# Altium PCB Minigeki v0.3 (Altium Designer).PcbDoc
Units mm, origin at the board's own origin, x right, y up, seen from the top; angles counter-clockwise.
Board outline 150 x 100 mm, 2 copper layers (Top Layer, Bottom Layer); 12 components, 21 nets, 143 pads, 19 vias.
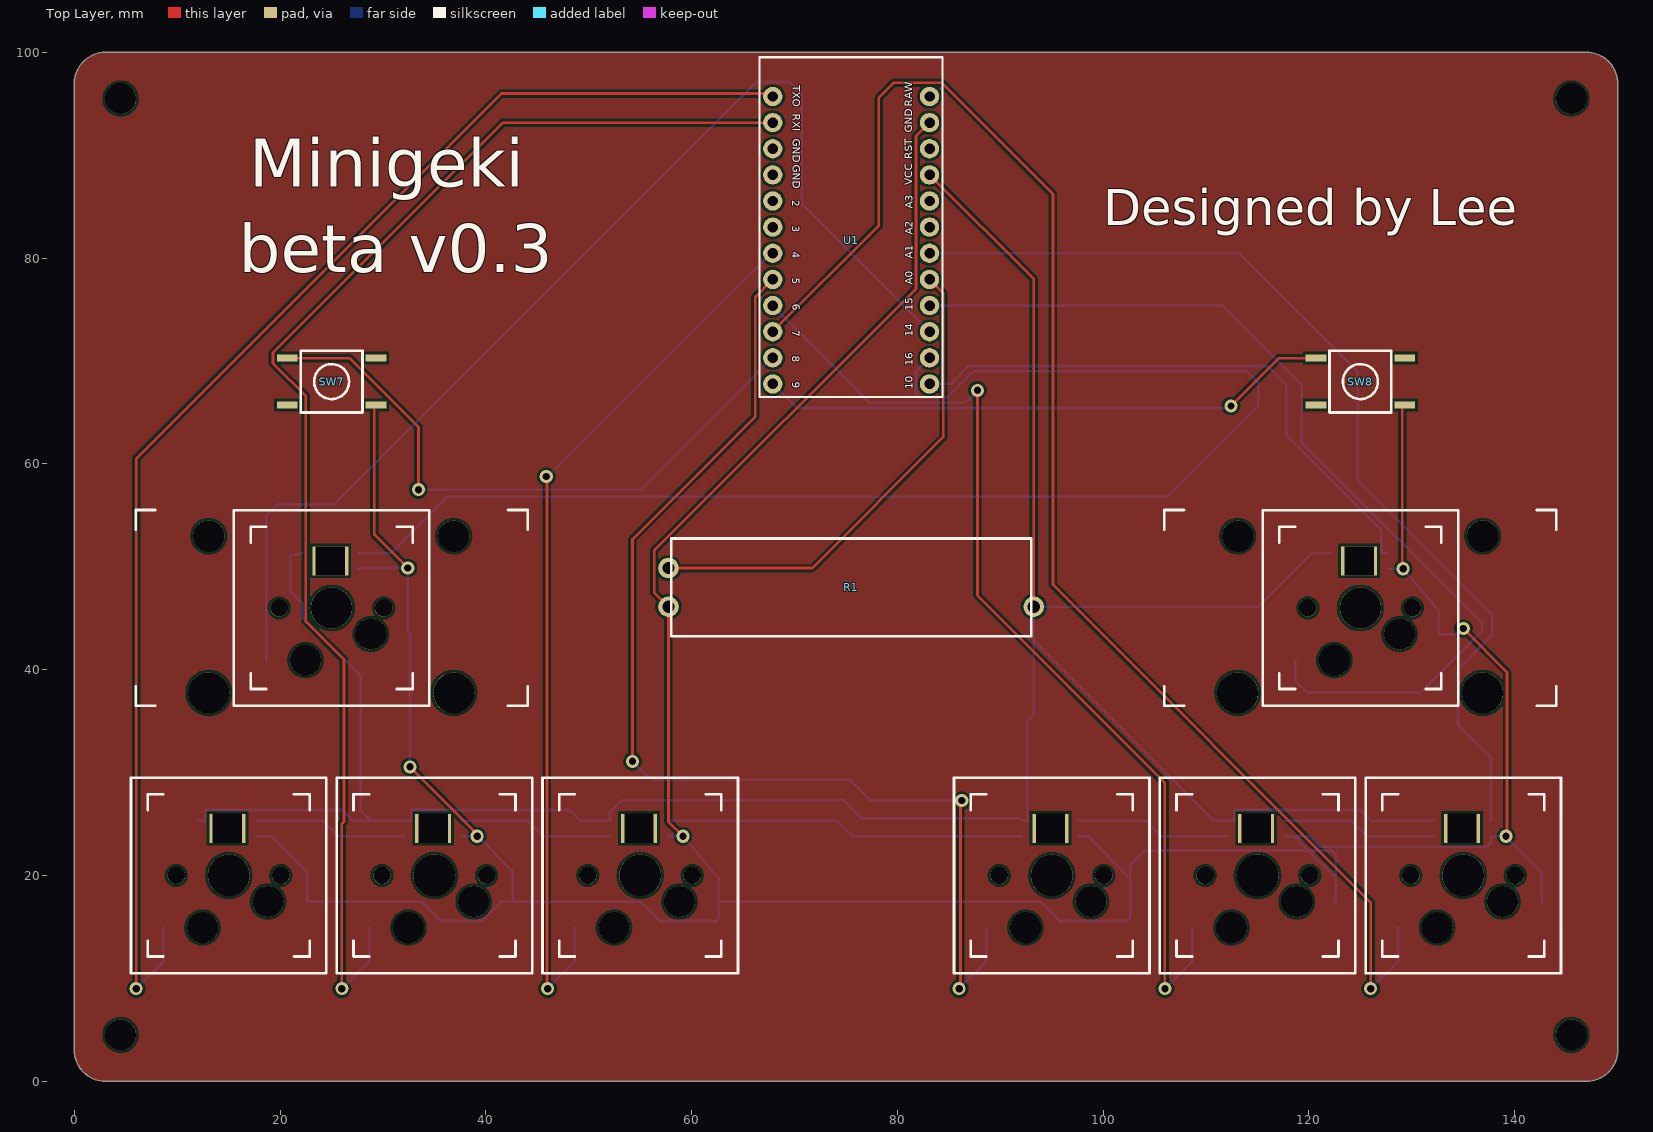
[diagram p0: Top Layer view]
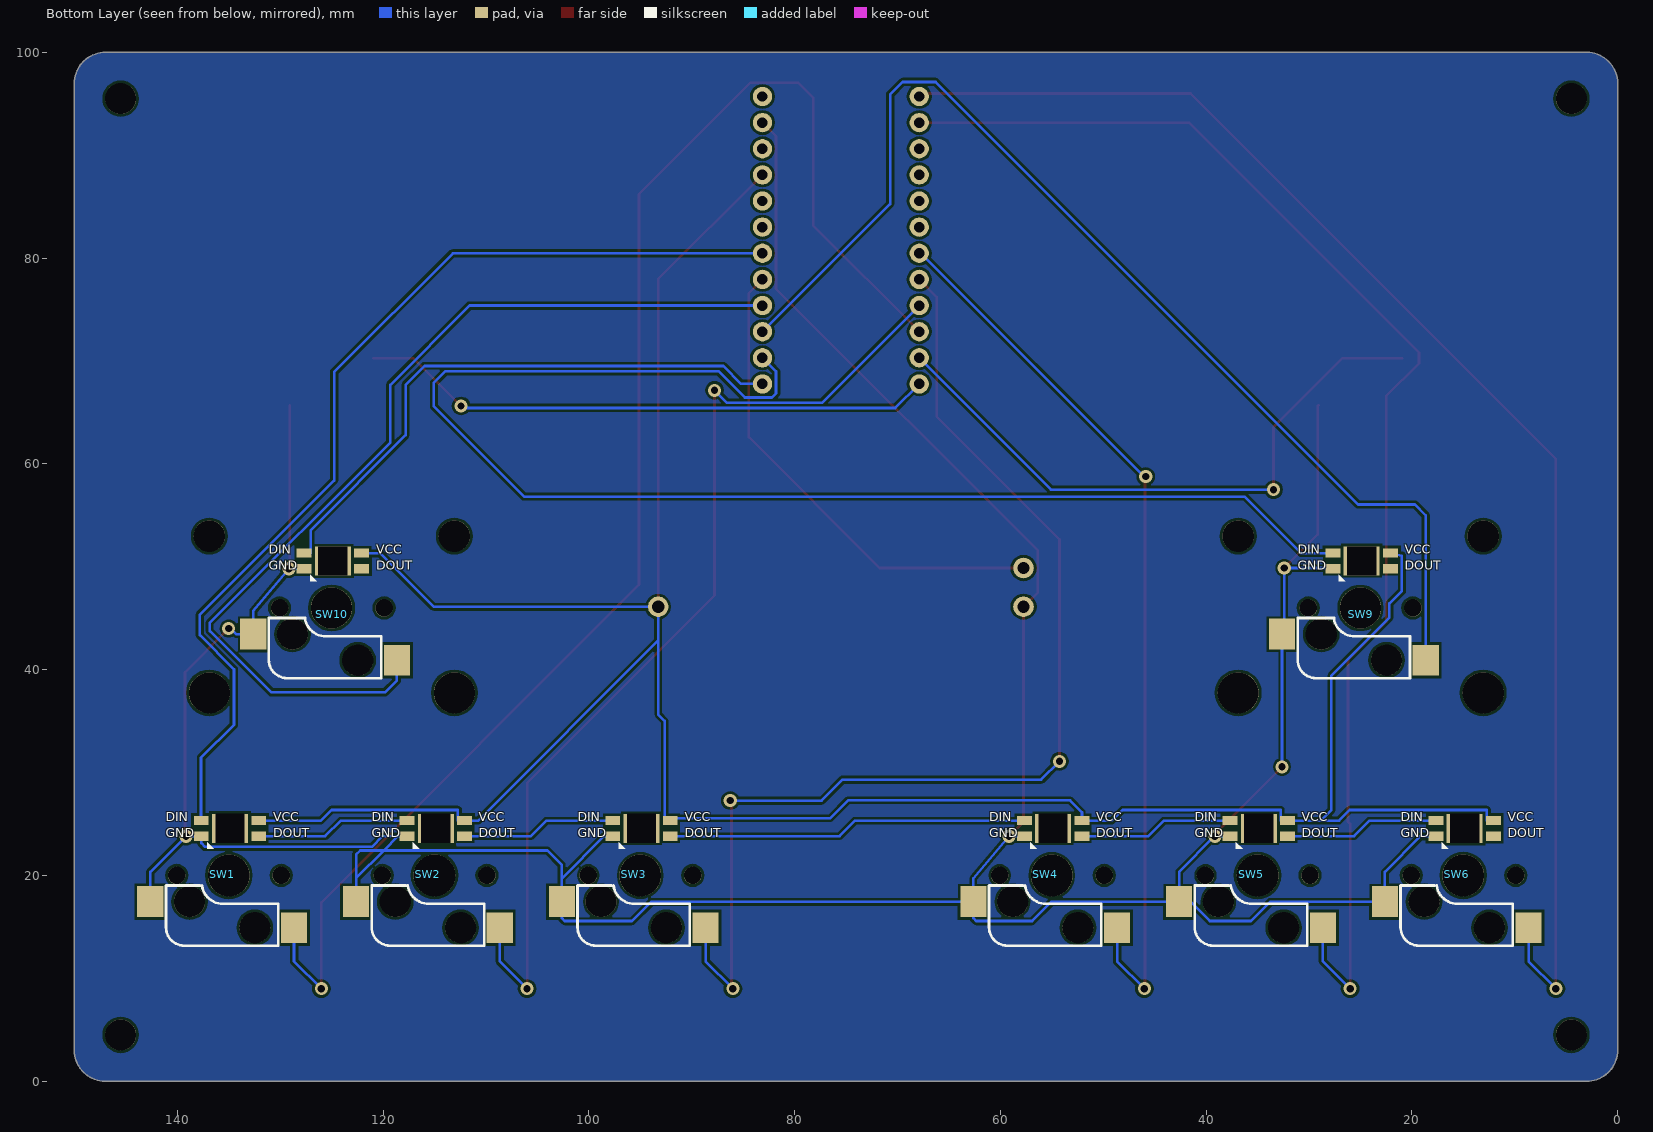
[diagram p1: Bottom Layer view, seen from below]

## Layer stack, top to bottom
Top Solder: solder mask 0.0102, Solder Resist, Dk 3.5
Top Layer: signal copper 0.0356
Dielectric 1: dielectric 0.32, FR-4, Dk 4.8
Bottom Layer: signal copper 0.0356
Bottom Solder: solder mask 0.0102, Solder Resist, Dk 3.5

## Board outline
0,3 ccw(c3,3) 3,0 147,0 ccw(c147,3) 150,3 150,97 ccw(c147,97) 147,100 3,100 ccw(c3,97) 0,97

## Design rules (kind name [scope] priority, off if disabled: settings)
Clearance [All] p1: gap=0.254 ignorepadtopadclearanceinfootprint=TRUE except(0: Arc-Hole Track-Hole SMDPad-Hole THPad-Hole Via-Hole Fill-Hole Poly-Hole Region-Hole Text-Hole)
PolygonConnect [All] p1: connectstyle=Relief reliefconductorwidth=0.254 reliefentries=4 polygonreliefangle="90 Angle" airgapwidth=0.254
RoutingVias [All] p1: holewidth=0.711 width=1.27 viastyle="Through Hole" minholewidth=0.711 minwidth=1.27 maxholewidth=0.711 maxwidth=1.27
SolderMaskExpansion [All] p1: expansion=0.102 istentingtop=FALSE
Width [All] p1: maxlimit=0.254 minlimit=0.254 preferedwidth=0.254
30 further rules are at their usual default settings.

## Components (designator, comment, footprint, x,y, rotation, side; value= is the part's Value field where it differs from the comment)
R1 "35mm滑动变阻器" 35MM滑动变阻器 75.5,48 r0 top
SW1 "MX_SW" MX_SW-1_HOTSWAP_RGB 135,20 r0 top
SW2 "MX_SW" MX_SW-1_HOTSWAP_RGB 115,20 r0 top
SW3 "MX_SW" MX_SW-1_HOTSWAP_RGB 95,20 r0 top
SW4 "MX_SW" MX_SW-1_HOTSWAP_RGB 55,20 r0 top
SW5 "MX_SW" MX_SW-1_HOTSWAP_RGB 35,20 r0 top
SW6 "MX_SW" MX_SW-1_HOTSWAP_RGB 15,20 r0 top
SW7 "SW_6X6" SW_6X6 25,68 r0 top
SW8 "SW_6X6" SW_6X6 125,68 r0 top
SW9 "MX_SW" MX_SW_2U_HOTSWAP_RGB 25,46 r0 top
SW10 "MX_SW" MX_SW_2U_HOTSWAP_RGB 125,46 r0 top
U1 "" PROMICRO 75.5,83 r0 top

## Footprints (in the part's own frame and the unit in brackets; to place one, negate y for a bottom-side part, rotate by r counter-clockwise, add the part's x,y. Pads: shape width x height; smd on the part's side, far side on the other; paste and mask are expansions set on the pad)
35MM滑动变阻器 [mm]
  round 2 hole 1.2: 1(-17.754,-1.88) 2(-17.754,1.88) 3(17.754,-1.88)
  silkscreen extent -17.5,-4.75 17.5,4.75
MX_SW-1_HOTSWAP_RGB [mil] "without Fixation pins  1-Pole"
  rect 100x118 smd far side: 1(300,-100) 2(-250,-200)
  rect 57x35.43 smd far side: 3(105,210) 4(105,150) 5(-115,210) 6(-115,150)
  round 66.93 hole 66.93 unplated: ""(-200.79,0) ""(199.21,0)
  round 118.11 hole 118.11 slot 118.31 at 0 deg unplated: ""(-100,-200.01) ""(150,-100.01)
  rect 137.8x110.24 hole 110.24 square unplated: ""(-5,180)
  round 160 hole 160: ""(0,0)
  silkscreen extent -374,-374 374,374
MX_SW_2U_HOTSWAP_RGB [mil]
  rect 100x118 smd far side: 1(300,-100) 2(-250,-200)
  rect 57x35.43 smd far side: 3(105,210) 4(105,150) 5(-115,210) 6(-115,150)
  round 157 hole 157 unplated: ""(-470,-325) ""(467.6,-325)
  round 120 hole 120 unplated: ""(-470,275) ""(467.6,275)
  round 66.93 hole 66.93 unplated: ""(-200.79,0) ""(199.21,0)
  round 118.11 hole 118.11 slot 118.31 at 0 deg unplated: ""(-100,-200.01) ""(150,-100.01)
  rect 137.8x110.24 hole 110.24 square unplated: ""(-5,180)
  round 158 hole 158 unplated: ""(0,0)
  silkscreen extent -750,-375 750,375
PROMICRO [mil] "promicro 5V"
  round 74 hole 40: 1(-300,500.5) 2(-300,400.5) 3(-300,300.5) 4(-300,200.5) 5(-300,100.5) 6(-300,0.5) 7(-300,-99.5) 8(-300,-199.5) 9(-300,-299.5) 10(-300,-399.5) 11(-300,-499.5) 12(-300,-599.5) 13(300,500.5) 14(300,400.5) 15(300,300.5) 16(300,200.5) 17(300,100.5) 18(300,0.5) 19(300,-99.5) 20(300,-199.5) 21(300,-299.5) 22(300,-399.5) 23(300,-499.5) 24(300,-599.5)
  silkscreen extent -350,-650 350,650
SW_6X6 [mm]
  rect 2x0.7 smd: 1(-4.318,2.286) 2(4.318,2.286) 3(-4.318,-2.286) 4(4.318,-2.286)
  silkscreen extent -3,-3 3,3

## Part data
SW1 SW2 SW3 SW4 SW5 SW6 SW9 SW10: library part MX_SW-1_RGB, "without Fixation pins  1-Pole"
U1: library part promicro

## Free pads (board coordinates)
  round 3 hole 3 unplated mask+0: ""(4.5,4.5) ""(4.5,95.5) ""(145.5,4.5) ""(145.5,95.5)

## Via types
v1: diameter 1.27, hole 0.711, Top Layer to Bottom Layer, 19 vias

## Nets (pads, with @x,y where several pads share a name; then routed paths per layer and width w, separated by ;. In a path a pad name is that pad's centre, name@x,y a point inside that pad or via, vN(x,y) a via of type N, cw(c..) or ccw(c..) an arc to the next point about the centre after c; other vN are vias at no path point)
A1: SW1.3 U1.19 | length 98.1
  Bottom Layer w0.254: U1.19 113.218,80.473 124.758,68.932 124.758,58.391 137.81,45.34 137.81,43.354 134.487,40.031 134.487,34.642 137.687,31.442 137.687,25.334 SW1.3
GND: R1.1 SW1.1 SW1.4 SW2.1 SW2.4 SW3.1 SW3.4 SW4.1 SW4.4 SW5.1 SW5.4 SW6.1 SW6.4 SW7.4 SW8.4 SW9.1 SW9.4 SW10.1 SW10.4 U1.14 | length 369.6
  Top Layer w0.254: SW7.4@29.064,65.714 29.153,65.625 29.153,53.133 v1(32.404,49.882) ; v1(32.62,30.554) 39.153,24.021 v1(39.153,23.81) ; v1(59.15,23.81) 57.746,25.214 R1.1 56.356,47.51 56.356,51.567 81.799,77.01 81.799,91.852 U1.14 ; SW8.4@129.064,65.714 129.051,65.714 129.051,49.912 v1(129.153,49.81) ; v1(135,44) 139.252,39.748 139.252,23.909 v1(139.153,23.81)
  Bottom Layer w0.254: SW6.4 19.145,23.81 22.62,20.335 SW6.1 33.736,17.46 35.63,15.567 39.629,15.567 41.523,17.46 SW5.1 ; SW9.4 27.739,49.882 v1(32.404,49.882) 32.404,43.676 SW9.1 v1(32.62,30.554) ; SW5.4 v1(39.153,23.81) 39.16,23.81 42.62,20.35 SW5.1 ; SW4.4 v1(59.15,23.81) 62.62,19.722 SW4.1 ; SW3.4 98.532,23.81 102.62,19.722 ; SW2.4 118.537,23.81 ; SW2.1 122.62,19.727 ; SW10.4 v1(129.153,49.81) 132.62,45.704 SW10.1 134.271,43.46 134.811,44 v1(135,44) ; v1(139.153,23.81) SW1.4 ; SW1.1 142.62,20.339 139.151,23.808 SW1.4 ; SW5.1 55.022,17.46 56.915,15.567 62.341,15.567 62.62,15.846 SW4.1 ; SW4.1 93.909,17.46 95.802,15.567 102.341,15.567 102.62,15.846 SW3.1 102.62,19.722 ; 102.62,19.722 102.62,21.013 104.032,22.425 119.923,22.425 ; 118.537,23.81 120.046,23.81 121.075,22.78 137.306,22.78 137.667,23.141 SW1.4 ; 118.537,23.81 119.923,22.425 ; 119.923,22.425 122.214,22.425 122.62,22.018 122.62,19.727 ; 119.923,22.425 122.62,19.727
LB: SW4.2 U1.7 | length 87.8
  Top Layer w0.254: v1(45.866,58.772) 45.933,58.705 45.933,9.067 v1(46,9)
  Bottom Layer w0.254: v1(45.866,58.772) 46.023,58.772 67.723,80.473 U1.7 ; v1(46,9) 48.65,11.65 SW4.2
Lever: R1.2 U1.20 | length 47.9
  Top Layer w0.254: R1.2 71.721,49.88 84.449,62.607 84.449,76.604 U1.20
LG: SW5.2 U1.2 | length 129.6
  Top Layer w0.254: v1(26,9) 26,25.018 26.206,25.224 26.206,40.967 22.498,44.675 22.498,66.581 19.301,69.778 19.301,70.815 41.659,93.173 U1.2
  Bottom Layer w0.254: v1(26,9) 28.65,11.65 SW5.2
LM: SW7.1 U1.11 | length 61.1
  Top Layer w0.254: SW7.1@20.936,70.286 26.732,70.286 33.445,63.573 v1(33.445,57.502)
  Bottom Layer w0.254: v1(33.445,57.502) 55.069,57.502 U1.11
LR: SW6.2 U1.1 | length 135.2
  Top Layer w0.254: v1(6,9) 6,60.5 41.5,96 67.593,96 U1.1
  Bottom Layer w0.254: v1(6,9) 8.65,11.65 SW6.2
LS: SW9.2 U1.22 | length 112.3
  Bottom Layer w0.254: SW9.2 18.65,55 19.704,56.054 25.216,56.054 66.288,97.126 69.488,97.126 70.707,95.907 70.707,85.265 U1.22
LSLED: SW9.3 U1.23 | length 134.6
  Bottom Layer w0.254: SW9.3 30.783,51.334 36.239,56.791 106.267,56.791 115.081,65.605 115.081,67.865 113.938,69.008 87.395,69.008 84.839,66.452 82.188,66.452 81.799,66.841 81.799,68.992 U1.23
NetSW1_6: SW1.6 SW2.3 | length 15
  Bottom Layer w0.254: SW2.3 124.098,25.334 125.622,23.81 SW1.6
NetSW2_6: SW2.6 SW3.3 | length 15
  Bottom Layer w0.254: SW3.3 104.108,25.334 105.632,23.81 SW2.6
NetSW3_6: SW3.6 SW4.3 | length 35
  Bottom Layer w0.254: SW4.3 74.111,25.334 75.635,23.81 SW3.6
NetSW4_6: SW4.6 SW5.3 | length 15
  Bottom Layer w0.254: SW5.3 44.088,25.334 45.612,23.81 SW4.6
NetSW5_6: SW5.6 SW6.3 | length 15
  Bottom Layer w0.254: SW6.3 24.098,25.334 25.622,23.81 SW5.6
RB: SW1.2 U1.10 | length 146.1
  Top Layer w0.254: U1.10 78.2,83.173 78.2,95.602 79.648,97.05 84.296,97.05 95.117,86.229 95.117,48.256 126,17.373 v1(126,9)
  Bottom Layer w0.254: v1(126,9) 128.65,11.65 SW1.2
RG: SW2.2 U1.9 | length 97
  Top Layer w0.254: v1(87.776,67.154) 87.776,47.224 106,29 v1(106,9)
  Bottom Layer w0.254: U1.9 77.329,65.944 86.566,65.944 v1(87.776,67.154) ; v1(106,9) 108.65,11.65 SW2.2
RM: SW8.1 U1.12 | length 56
  Top Layer w0.254: v1(112.414,65.63) 117.07,70.286 SW8.1@120.936,70.286
  Bottom Layer w0.254: U1.12 70.217,65.436 112.22,65.436 v1(112.414,65.63)
RR: SW3.2 U1.8 | length 111.5
  Top Layer w0.254: v1(54.248,31.086) 54.248,52.676 66.186,64.614 66.186,76.239 U1.8 ; v1(86,9) 86.126,9.126 86.126,27.15 v1(86.252,27.276)
  Bottom Layer w0.254: v1(54.248,31.086) 56.026,29.308 75.33,29.308 77.362,27.276 v1(86.252,27.276) ; v1(86,9) 88.65,11.65 SW3.2
RS: SW10.2 U1.21 | length 93.6
  Bottom Layer w0.254: U1.21 111.592,75.393 119.297,67.687 119.297,62.099 136.823,44.573 136.823,43.761 130.854,37.792 119.818,37.792 118.65,38.96 SW10.2
RSLED: SW10.3 U1.24 | length 57
  Bottom Layer w0.254: U1.24 85.185,67.773 86.929,69.516 115.97,69.516 117.795,67.691 117.795,62.789 127.019,53.565 127.019,51.334 SW10.3
VCC: R1.3 SW1.5 SW2.5 SW3.5 SW4.5 SW5.5 SW6.5 SW9.5 SW10.5 U1.16 | length 261.4
  Top Layer w0.254: U1.16 93.254,77.959 R1.3
  Bottom Layer w0.254: SW6.5 12.719,25.334 12.719,26.362 26.042,26.362 27.07,25.334 28.848,25.334 ; SW9.5 20.974,51.08 20.974,47.647 22.193,46.428 22.193,45.056 27.832,39.417 27.832,26.35 28.848,25.334 ; SW4.5 SW4.5@52.064,25.334 ; SW10.5 120.292,51.334 115.078,46.12 R1.3 93.254,42.818 ; SW1.5 126.04,25.334 125.012,26.362 112.719,26.362 112.719,25.334 SW2.5 110.738,25.334 93.254,42.818 ; 28.848,25.334 SW5.5 32.734,25.334 32.734,26.362 48.127,26.362 49.154,25.334 SW4.5@52.064,25.334 ; SW4.5@52.064,25.334 52.064,26.133 53.232,27.301 74.797,27.301 76.525,25.573 91.84,25.573 SW3.5 92.627,25.334 92.627,35.023 93.254,35.65 93.254,42.818
pads on no net: SW1. SW2. SW3. SW4. SW5. SW6. SW6.6 SW7.2 SW7.3 SW8.2 SW8.3 SW9. SW9.6 SW10. SW10.6 U1.3 U1.4 U1.5 U1.6 U1.13 U1.15 U1.17 U1.18

## Polygon pours and split planes (outlines as drawn)
no net on Top Layer "NONET_L01_P000" (solid, pour order 0): 0,3 ccw(c3,3) 3,0 147,0 ccw(c147,3) 150,3 150,97 ccw(c147,97) 147,100 3,100 ccw(c3,97) 0,97
no net on Bottom Layer "NONET_L02_P001" (solid, pour order 1): 0,3 ccw(c3,3) 3,0 147,0 ccw(c147,3) 150,3 150,97 ccw(c147,97) 147,100 3,100 ccw(c3,97) 0,97

## Silkscreen, mask and mechanical layers (free items; w line width, h text height)
Top Overlay:
  text "Minigeki" at 17.006,85.4 h8
  text "Designed by Lee" at 100,82.05 h6
  text "beta v0.3" at 16,77.061 h8
Mechanical 1:
  the board outline again, w0.254

## Text inside footprints (layer, text, board x,y; h text height)
SW1: Bottom Overlay "DOUT" at 130.682,23.441 h1.52; Bottom Overlay "VCC" at 130.682,24.964 h1.52; Bottom Overlay "DIN" at 141.096,24.953 h1.52; Bottom Overlay "GND" at 141.096,23.441 h1.52
SW2: Bottom Overlay "GND" at 121.096,23.441 h1.52; Bottom Overlay "DIN" at 121.096,24.953 h1.52; Bottom Overlay "VCC" at 110.682,24.964 h1.52; Bottom Overlay "DOUT" at 110.682,23.441 h1.52
SW3: Bottom Overlay "GND" at 101.096,23.441 h1.52; Bottom Overlay "DIN" at 101.096,24.953 h1.52; Bottom Overlay "VCC" at 90.682,24.964 h1.52; Bottom Overlay "DOUT" at 90.682,23.441 h1.52
SW4: Bottom Overlay "DOUT" at 50.682,23.441 h1.52; Bottom Overlay "VCC" at 50.682,24.964 h1.52; Bottom Overlay "DIN" at 61.096,24.953 h1.52; Bottom Overlay "GND" at 61.096,23.441 h1.52
SW5: Bottom Overlay "GND" at 41.096,23.441 h1.52; Bottom Overlay "DIN" at 41.096,24.953 h1.52; Bottom Overlay "VCC" at 30.682,24.964 h1.52; Bottom Overlay "DOUT" at 30.682,23.441 h1.52
SW6: Bottom Overlay "DOUT" at 10.682,23.441 h1.52; Bottom Overlay "VCC" at 10.682,24.964 h1.52; Bottom Overlay "DIN" at 21.096,24.953 h1.52; Bottom Overlay "GND" at 21.096,23.441 h1.52
SW9: Bottom Overlay "GND" at 31.096,49.441 h1.52; Bottom Overlay "DIN" at 31.096,50.953 h1.52; Bottom Overlay "VCC" at 20.682,50.964 h1.52; Bottom Overlay "DOUT" at 20.682,49.441 h1.52
SW10: Bottom Overlay "DOUT" at 120.682,49.441 h1.52; Bottom Overlay "VCC" at 120.682,50.964 h1.52; Bottom Overlay "DIN" at 131.096,50.953 h1.52; Bottom Overlay "GND" at 131.096,49.441 h1.52
U1: Top Overlay "9" at 69.774,67.98 h0.76 r270; Top Overlay "8" at 69.774,70.49 h0.76 r270; Top Overlay "7" at 69.774,73.001 h0.76 r270; Top Overlay "6" at 69.786,75.508 h0.76 r275; Top Overlay "5" at 69.774,78.111 h0.76 r270; Top Overlay "4" at 69.774,80.621 h0.76 r270; Top Overlay "3" at 69.774,83.132 h0.76 r270; Top Overlay "2" at 69.774,85.642 h0.76 r270; Top Overlay "GND" at 69.81,89.071 h0.76 r270; Top Overlay "GND" at 69.81,91.611 h0.76 r270; Top Overlay "RXI" at 69.81,94.024 h0.76 r270; Top Overlay "TXO" at 69.81,96.818 h0.76 r270; Top Overlay "10" at 81.469,67.265 h0.76 r90; Top Overlay "16" at 81.469,69.551 h0.76 r90; Top Overlay "14" at 81.469,72.345 h0.76 r90; Top Overlay "15" at 81.469,74.885 h0.76 r90; Top Overlay "A0" at 81.469,77.425 h0.76 r90; Top Overlay "A1" at 81.469,79.965 h0.76 r90; Top Overlay "A2" at 81.469,82.251 h0.76 r90; Top Overlay "A3" at 81.469,84.791 h0.76 r90; Top Overlay "VCC" at 81.444,87.089 h0.76 r90; Top Overlay "RST" at 81.444,89.629 h0.76 r90; Top Overlay "GND" at 81.444,92.169 h0.76 r90; Top Overlay "RAW" at 81.444,94.709 h0.76 r90